# Altium PCB helix_4_single_shield_host.PcbDoc (part 1 of 2)
Units mm, origin at the board's own origin, x right, y up, seen from the top; angles counter-clockwise.
Board outline 54.61 x 130.81 mm, 2 copper layers (Top Layer, Bottom Layer); 77 components, 135 nets, 533 pads, 664 vias.
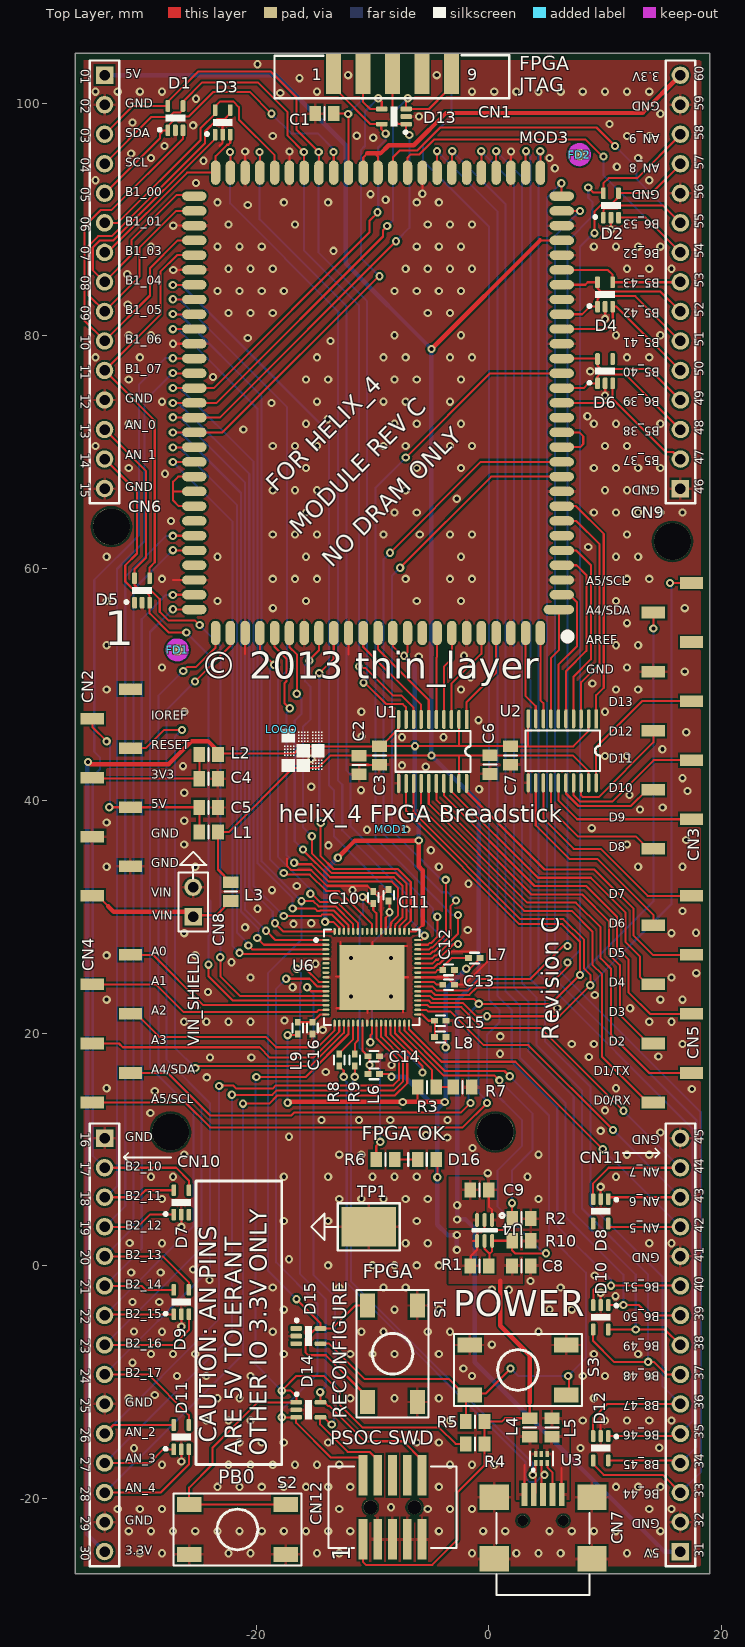
[diagram p0: Top Layer view]
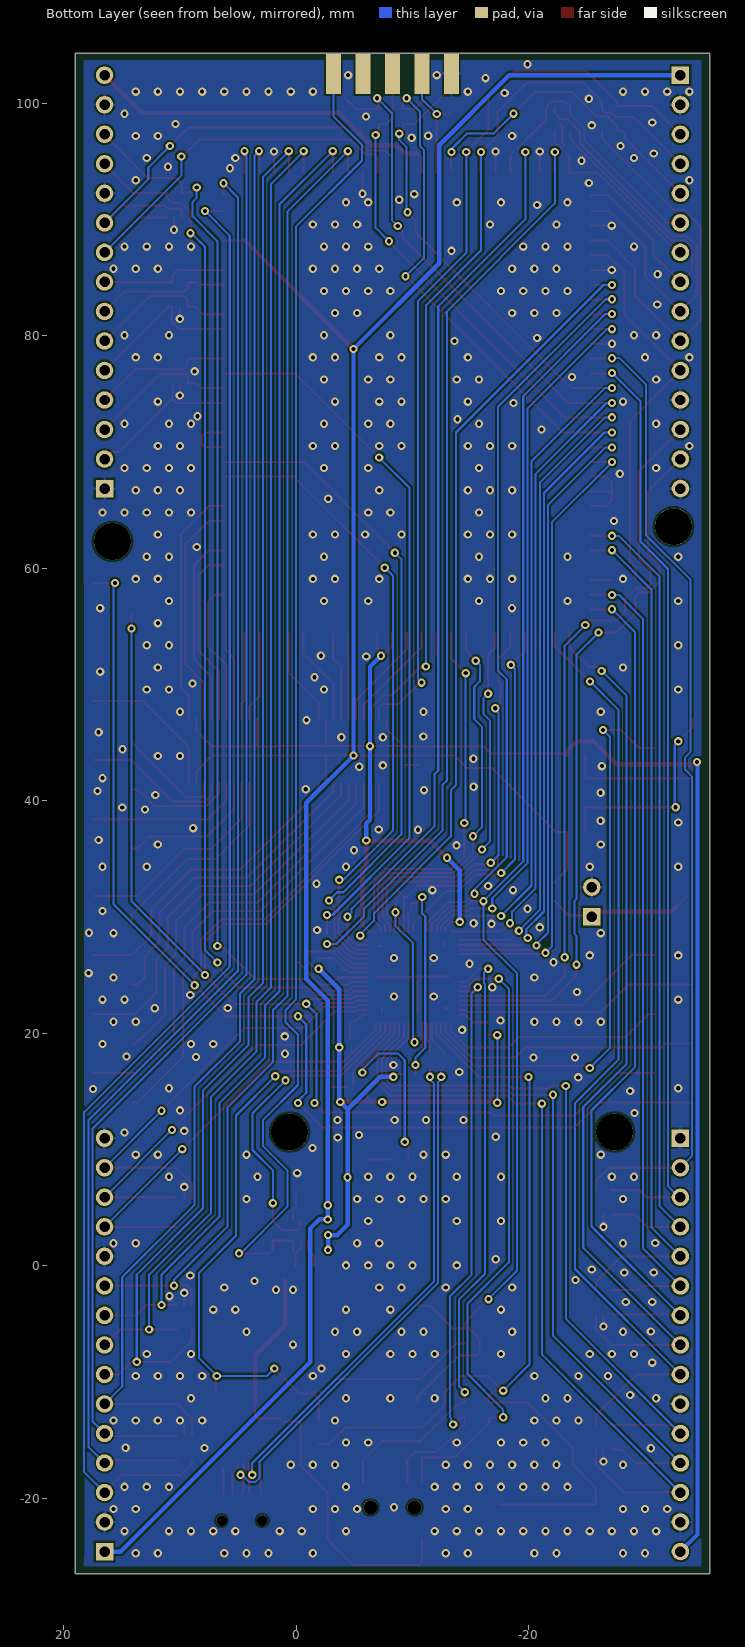
[diagram p1: Bottom Layer view, seen from below]

## Layer stack, top to bottom
Top Layer: signal copper 0.0356
Dielectric: core 0.32, FR-4, Dk 4.8
Bottom Layer: signal copper 0.0356

## Board outline
-35.598,-26.486 -35.598,104.324 19.012,104.324 19.012,-26.486

## Design rules (kind name [scope] priority, off if disabled: settings)
Clearance [All] p1: gap=0.178
ComponentClearance "Ignore Shield" [InComponent('MOD1')] p1: gap=0 collisioncheckmode=3 verticalgap=0 showdistances=TRUE
ComponentClearance [All] p2: gap=0.254 collisioncheckmode=3 verticalgap=0.254 showdistances=FALSE
HoleSize [All] p1: absolutevalues=TRUE maxlimit=25.4 minlimit=0.356 maxpercent=80.000 minpercent=20.000
PolygonConnect PolygonConnect_1 [All vs IsVia] p1: connectstyle=Direct reliefconductorwidth=0.254 reliefentries=4 polygonreliefangle="90 Angle"
PolygonConnect [All] p2: connectstyle=Relief reliefconductorwidth=0.254 reliefentries=4 polygonreliefangle="90 Angle"
RoutingVias [All] p1: holewidth=0.356 width=0.711 viastyle="Through Hole" minholewidth=0.356 minwidth=0.711 maxholewidth=0.711 maxwidth=1.27
SilkscreenOverComponentPads [All] p1: minsilkscreentomaskgap=0.254
SolderMaskExpansion [All] p1: expansion=0.102
Width [All] p1: maxlimit=2.032 minlimit=0.178 preferedwidth=0.178 minimp=50.000000 maximp=50.000000 favimp=50.000000
25 further rules are at their usual default settings.

## Components (designator, comment, footprint, x,y, rotation, side; value= is the part's Value field where it differs from the comment)
C1 "1uF" 0805 -14.135,99.117 r0 top
C2 "1uF" 0805 -11.171,43.09 r90 top locked
C3 "1uF" 0805 -9.407,43.89 r90 top locked
C4 "10uF" 0805 -24.105,41.903 r0 top
C5 "10uF" 0805 -24.105,39.427 r0 top
C6 "1uF" 0805 0.089,43.11 r90 top
C7 "1uF" 0805 1.867,43.89 r90 top
C8 "10uF 20V" 0805 2.794,0 r0 top
C9 "10uF" 0805 -0.8,6.534 r0 top
C10 "1uF" 0402_HD -9.944,31.68 r90 top
C11 "1uF" 0402_HD -8.624,31.877 r270 top
C12 "1uF" 0402_HD -3.467,25.457 r0 top
C13 "1uF" 0402_HD -3.467,24.187 r0 top
C14 "1uF" 0402_HD -9.894,18.034 r0 top
C15 "1uF" 0402_HD -4.179,21.082 r180 top
C16 "1uF" 0402_HD -15.178,20.453 r90 top
CN1 "Altera JTAG 2x5 Header" BOXHDR2X5_EDGE -13.373,105.34 r0 top
CN2 "UNO_SHIELD_POWER" UNO_SHIELD_POWER -30.831,49.609 r0 top locked
CN3 "UNO_SHIELD_DH" UNO_SHIELD_DH 14.149,35.893 r0 top locked
CN4 "UNO_SHIELD_ANALOG" UNO_SHIELD_ANALOG -30.831,26.749 r0 top locked
CN5 "UNO_SHIELD_DL" UNO_SHIELD_DL 14.149,14.049 r0 top locked
CN6 "Header 15" HDR1X15 -33.058,102.419 r270 top
CN7 "Header 5" USB_MINI_B 4.661,-19.661 r0 top
CN8 "Header 2" HDR1X2 -25.438,30.029 r90 top
CN9 "Header 15" HDR1X15 16.472,66.859 r90 top
CN10 "Header 15" HDR1X15 -33.058,10.979 r270 top
CN11 "Header 15" HDR1X15 16.472,-24.581 r90 top
CN12 "Header Keyed 50mil SMD" SBH41_127_10W_DUAL -8.293,-20.771 r0 top
D1 "CPDV5-3V3UP" SOT-353 -26.962,98.719 r90 top
D2 "CPDV5-3V3UP" SOT-353 10.503,91.218 r90 top
D3 "CPDV5-3V3UP" SOT-353 -22.898,98.355 r90 top
D4 "CPDV5-3V3UP" SOT-353 9.995,83.559 r90 top
D5 "CPDV5-3V3UP" SOT-353 -29.832,58.096 r90 top
D6 "CPDV5-3V3UP" SOT-353 9.995,76.955 r90 top
D7 "CPDV5-3V3UP" SOT-353 -26.454,5.454 r90 top
D8 "CPDV5-3V3UP" SOT-353 9.614,4.692 r270 top
D9 "CPDV5-3V3UP" SOT-353 -26.454,-3.118 r90 top
D10 "CPDV5-3V3UP" SOT-353 9.614,-4.424 r270 top
D11 "CPDV5-3V3UP" SOT-353 -26.454,-14.739 r90 top
D12 "CPDV5-3V3UP" SOT-353 9.614,-15.691 r270 top
D13 "CPDV5-3V3UP" SOT-353 -8.166,98.863 r180 top
D14 "CPDV5-3V3UP" sot-353 -15.532,-12.389 r0 top
D15 "CPDV5-3V3UP" sot-353 -15.532,-6.039 r0 top
D16 "RED" 0805_HD_LED -5.334,9.144 r0 top
FD1 "1MM FIDUCIAL MARK" FID_1MM -26.81,52.984 r270 top
FD2 "1MM FIDUCIAL MARK" FID_1MM 7.79,95.584 r270 top
L1 "FERRITE" 0805 -24.105,37.331 r180 top
L2 "FERRITE" 0805 -24.105,43.999 r180 top
L3 "FERRITE DO NOT FIT" 0805 -22.2,32.188 r270 top
L4 "FERRITE" 0805 3.518,-13.913 r90 top
L5 "FERRITE" 0805 5.423,-13.913 r90 top
L6 "FERRITE" 0402_HD -9.894,16.51 r180 top
L7 "FERRITE" 0402_HD -1.245,26.473 r0 top
L8 "FERRITE" 0402_HD -4.179,19.685 r0 top
L9 "FERRITE" 0402_HD -16.448,20.453 r270 top
LOGO "Comment" "LOGO_SMALL - SILK" -17.818,46.158 r0 top
MOD1 "UNO SHIELD" UNO_SHIELD_MECH_NO_OUTLINE -30.831,49.609 r0 top locked
MOD3 "helix_4" HELIX_4_LCC104_HOST -9.535,74.234 r180 top locked
R1 "100K" 0805 -0.8,0 r180 top
R2 "10K" 0805 2.806,4.064 r180 top
R3 "100K" 0805 -5.322,15.367 r0 top
R4 "100K" 0805 -1.181,-15.31 r180 top
R5 "100K" 0805 -1.181,-13.405 r180 top
R6 "330R" 0805 -8.89,9.144 r180 top
R7 "100K" 0805 -2.274,15.367 r0 top
R8 "24R" 0402_HD -12.865,17.71 r270 top
R9 "24R" 0402_HD -11.532,17.71 r270 top
R10 "DO NOT FIT" 0805 2.806,2.159 r180 top
S1 "SW-PB" FSM4JSMA -8.293,-7.563 r180 top
S2 "SW-PB" FSM4JSMA -21.628,-22.676 r90 top
S3 "SW-PB" FSM4JSMA 2.502,-8.96 r270 top
TP1 "Test Point" TEST_POINT -10.325,3.359 r0 top
U1 "TXB0108" TSSOP20 -1.921,47.002 r270 top
U2 "TXB0108" TSSOP20 9.233,47.047 r270 top
U3 "SN65220 USB TVS SOT23-6_0" DRY6 4.026,-16.961 r0 top
U4 "MOSFET P/N" WSMini6-F1-B -0.369,3.048 r270 top
U6 "CY8C32xx_QFN68" PSOC_QFN68_HD -10.071,24.822 r0 top

## Footprints (in the part's own frame and the unit in brackets; to place one, negate y for a bottom-side part, rotate by r counter-clockwise, add the part's x,y. Pads: shape width x height; smd on the part's side, far side on the other; paste and mask are expansions set on the pad)
0402_HD [mm]
  rect 0.6x0.5 smd: 1(-0.5,0) 2(0.5,0)
  silkscreen extent -0.38,-0.46 0.38,0.46
0805 [mm] "Chip Resistor, Body 2.0x1.3mm, IPC High Density"
  rect 1x1.3 smd: 1(-0.8,0) 2(0.8,0)
  silkscreen extent 0,-0.55 0,0.55, body extent -1.07,-0.7 1.08,0.7, height 0.65
0805_HD_LED [mm] "Chip Resistor, Body 2.0x1.3mm, IPC High Density"
  rect 1x1.3 smd: A(0.8,0) K(-0.8,0)
  silkscreen extent -1.6,-0.55 0,0.55, body extent -1.07,-0.7 1.07,0.7, height 0.65
BOXHDR2X5_EDGE [mm] "Connector; Header; 5x2 Position"
  rect 1.27x3.5 smd: 1(0,-2.8) 3(2.54,-2.8) 5(5.08,-2.8) 7(7.62,-2.8) 9(10.16,-2.8)
  rect 1.27x3.5 smd far side: 2(0,-2.8) 4(2.54,-2.8) 6(5.08,-2.8) 8(7.62,-2.8) 10(10.16,-2.8)
  silkscreen extent -5.07,-4.9 15.13,-1.22
DRY6 [mm]
  rect 0.3x0.52 smd paste-0.015 mask+0.05: 1(0,0) 2(0.5,0) 3(1,0) 4(1,0.78) 5(0.5,0.78) 6(0,0.78)
  silkscreen extent -0.5,-0.7 1.5,1
FID_1MM [mm]
  round 1 smd paste+0 mask+0: 0(0,0)
  Top Layer keep-out circle w0.5: c0,0 r0.75
  Top Solder keep-out circle w0.5: c0,0 r0.75
FSM4JSMA [mm] "Push Button Switch"
  rect 1.3x2.1 smd: 1(-2.15,4.15) 1(-2.15,-4.15) 2(2.15,4.15) 2(2.15,-4.15)
  silkscreen extent -3.1,-5.5 3.1,5.5
HDR1X2 [mm] "Connector; Header; 2 Position"
  rect 1.5x1.5 hole 0.9: 1(0,0)
  round 1.5 hole 0.9: 2(2.54,0)
  silkscreen extent -1.27,-1.27 3.81,1.27
HDR1X15 [mm] "Connector; Header; 15 Position"
  rect 1.5x1.5 hole 0.9: 1(0,0)
  round 1.5 hole 0.9: 2(2.54,0) 3(5.08,0) 4(7.62,0) 5(10.16,0) 6(12.7,0) 7(15.24,0) 8(17.78,0) 9(20.32,0) 10(22.86,0) 11(25.4,0) 12(27.94,0) 13(30.48,0) 14(33.02,0) 15(35.56,0)
  silkscreen extent -1.27,-1.27 36.83,1.27
HELIX_4_LCC104_HOST [mm] "Module socket 32x40mm"
  oval 2.6x0.813 smd: 1(-15.55,17.78)
  oval 2.1x0.813 smd: 2(-15.8,16.51) 3(-15.8,15.24) 4(-15.8,13.97) 5(-15.8,12.7) 6(-15.8,11.43) 7(-15.8,10.16) 8(-15.8,8.89) 9(-15.8,7.62) 10(-15.8,6.35) 11(-15.8,5.08) 12(-15.8,3.81) 13(-15.8,2.54) 14(-15.8,1.27) 15(-15.8,0) 16(-15.8,-1.27) 17(-15.8,-2.54) 18(-15.8,-3.81) 19(-15.8,-5.08) 20(-15.8,-6.35) 21(-15.8,-7.62) 22(-15.8,-8.89) 23(-15.8,-10.16) 24(-15.8,-11.43) 25(-15.8,-12.7) 26(-15.8,-13.97) 27(-15.8,-15.24) 28(-15.8,-16.51) 29(-15.8,-17.78) 53(15.8,-17.78) 54(15.8,-16.51) 55(15.8,-15.24) 56(15.8,-13.97) 57(15.8,-12.7) 58(15.8,-11.43) 59(15.8,-10.16) 60(15.8,-8.89) 61(15.8,-7.62) 62(15.8,-6.35) 63(15.8,-5.08) 64(15.8,-3.81) 65(15.8,-2.54) 66(15.8,-1.27) 67(15.8,0) 68(15.8,1.27) 69(15.8,2.54) 70(15.8,3.81) 71(15.8,5.08) 72(15.8,6.35) 73(15.8,7.62) 74(15.8,8.89) 75(15.8,10.16) 76(15.8,11.43) 77(15.8,12.7) 78(15.8,13.97) 79(15.8,15.24) 80(15.8,16.51) 81(15.8,17.78)
  oval 0.813x2.1 smd: 30(-13.97,-19.8) 31(-12.7,-19.8) 32(-11.43,-19.8) 33(-10.16,-19.8) 34(-8.89,-19.8) 35(-7.62,-19.8) 36(-6.35,-19.8) 37(-5.08,-19.8) 38(-3.81,-19.8) 39(-2.54,-19.8) 40(-1.27,-19.8) 41(0,-19.8) 42(1.27,-19.8) 43(2.54,-19.8) 44(3.81,-19.8) 45(5.08,-19.8) 46(6.35,-19.8) 47(7.62,-19.8) 48(8.89,-19.8) 49(10.16,-19.8) 50(11.43,-19.8) 51(12.7,-19.8) 52(13.97,-19.8) 82(13.97,19.8) 83(12.7,19.8) 84(11.43,19.8) 85(10.16,19.8) 86(8.89,19.8) 87(7.62,19.8) 88(6.35,19.8) 89(5.08,19.8) 90(3.81,19.8) 91(2.54,19.8) 92(1.27,19.8) 93(0,19.8) 94(-1.27,19.8) 95(-2.54,19.8) 96(-3.81,19.8) 97(-5.08,19.8) 98(-6.35,19.8) 99(-7.62,19.8) 100(-8.89,19.8) 101(-10.16,19.8) 102(-11.43,19.8) 103(-12.7,19.8) 104(-13.97,19.8)
  silkscreen extent -16.6,19.8 -16,20.4
"LOGO_SMALL - SILK" [mm]
  silkscreen extent 0,-3.68 3.68,0
PSOC_QFN68_HD [mm] "QFN, 68-Leads, Body 8.1x8.1mm (max), Pitch 0.40mm, IPC High Density"
  oval 0.6x0.2 smd: 1(-3.95,3.2) 2(-3.95,2.8) 3(-3.95,2.4) 4(-3.95,2) 5(-3.95,1.6) 6(-3.95,1.2) 7(-3.95,0.8) 8(-3.95,0.4) 9(-3.95,0) 10(-3.95,-0.4) 11(-3.95,-0.8) 12(-3.95,-1.2) 13(-3.95,-1.6) 14(-3.95,-2) 15(-3.95,-2.4) 16(-3.95,-2.8) 17(-3.95,-3.2) 35(3.95,-3.2) 36(3.95,-2.8) 37(3.95,-2.4) 38(3.95,-2) 39(3.95,-1.6) 40(3.95,-1.2) 41(3.95,-0.8) 42(3.95,-0.4) 43(3.95,0) 44(3.95,0.4) 45(3.95,0.8) 46(3.95,1.2) 47(3.95,1.6) 48(3.95,2) 49(3.95,2.4) 50(3.95,2.8) 51(3.95,3.2)
  oval 0.2x0.6 smd: 18(-3.2,-3.95) 19(-2.8,-3.95) 20(-2.4,-3.95) 21(-2,-3.95) 22(-1.6,-3.95) 23(-1.2,-3.95) 24(-0.8,-3.95) 25(-0.4,-3.95) 26(0,-3.95) 27(0.4,-3.95) 28(0.8,-3.95) 29(1.2,-3.95) 30(1.6,-3.95) 31(2,-3.95) 32(2.4,-3.95) 33(2.8,-3.95) 34(3.2,-3.95) 52(3.2,3.95) 53(2.8,3.95) 54(2.4,3.95) 55(2,3.95) 56(1.6,3.95) 57(1.2,3.95) 58(0.8,3.95) 59(0.4,3.95) 60(0,3.95) 61(-0.4,3.95) 62(-0.8,3.95) 63(-1.2,3.95) 64(-1.6,3.95) 65(-2,3.95) 66(-2.4,3.95) 67(-2.8,3.95) 68(-3.2,3.95)
  rect 5.588x5.588 smd: 69(0,0)
  silkscreen extent -4.92,-4.1 4.1,4.1, body extent -4.05,-4.05 4.05,4.05, height 1
SBH41_127_10W_DUAL [mm] "SBH41_NBPB_Dxx"
  rect 0.76x3.5 smd: 1(-2.54,-2.75) 2(-2.54,2.75) 3(-1.27,-2.75) 4(-1.27,2.75) 5(0,-2.75) 6(0,2.75) 7(1.27,-2.75) 8(1.27,2.75) 9(2.54,-2.75) 10(2.54,2.75)
  round 1.2 hole 1.2 unplated: 11(-1.905,0) 12(1.905,0)
  silkscreen extent -5.5,-3.5 5.5,3.5
SOT-353 [mm] "Small outline 2.1mm L x 1.25mm W x 1mm H; 5LD SC-70; SC-88A"
  round 0.5 on Mech14: 0(0,0)
  rrect50% 1x0.4 smd: 1(-1.05,0.65) 2(-1.05,0) 3(-1.05,-0.65) 4(1.05,-0.65) 5(1.05,0.65)
  silkscreen extent -1.1,-0.85 0.3,1.45, body extent -1.2,-1.1 1.2,1.1, height 1.1
sot-353 [mm] "Small outline 2.1mm L x 1.25mm W x 1mm H; 5LD SC-70; SC-88A"
  round 0.5 on Mech14: 0(0,0)
  rrect50% 1x0.4 smd: 1(-1.05,0.65) 2(-1.05,0) 3(-1.05,-0.65) 4(1.05,-0.65) 5(1.05,0.65)
  silkscreen extent -1.1,-0.85 0.3,1.45, body extent -1.2,-1.1 1.2,1.1, height 1.1
TEST_POINT [mm]
  rect 4.7x3.43 smd paste-3: 1(0,0)
  silkscreen extent -2.67,-2.03 2.67,2.03
TSSOP20 [mm]
  rect 1.65x0.3 smd: 1(0,0)
  oval 1.65x0.3 smd: 2(0,-0.65) 3(0,-1.3) 4(0,-1.95) 5(0,-2.6) 6(0,-3.25) 7(0,-3.9) 8(0,-4.55) 9(0,-5.2) 10(0,-5.85) 11(5.5,-5.85) 12(5.5,-5.2) 13(5.5,-4.55) 14(5.5,-3.9) 15(5.5,-3.25) 16(5.5,-2.6) 17(5.5,-1.95) 18(5.5,-1.3) 19(5.5,-0.65) 20(5.5,0)
  silkscreen extent 1,-6.1 4.5,0.33
UNO_SHIELD_ANALOG [mm] "Connector; Header; 2 Position"
  rect 2x1 smd: 9(0,0) 10(-3.28,-2.54) 11(0,-5.08) 12(-3.28,-7.62) 13(0,-10.16) 14(-3.28,-12.7)
UNO_SHIELD_DH [mm]
  rect 2x1 smd: 29(0,-0.016) 30(3.28,2.524) 31(0,5.064) 32(3.28,7.604) 33(0,10.144) 34(3.28,12.684) 35(0,15.224) 36(3.28,17.764) 37(0,20.304) 38(3.28,22.844)
UNO_SHIELD_DL [mm]
  rect 2x1 smd: 21(0,0) 22(3.28,2.54) 23(0,5.08) 24(3.28,7.62) 25(0,10.16) 26(3.28,12.7) 27(0,15.24) 28(3.28,17.78)
UNO_SHIELD_MECH_NO_OUTLINE [mm]
  round 3.175 hole 3.175 unplated: 0(-1.64,13.97) 0(3.44,-38.1) 0(31.38,-38.1) 0(46.62,12.7)
UNO_SHIELD_POWER [mm]
  rect 2x1 smd: 1(0,0) 2(-3.28,-2.54) 3(0,-5.08) 4(-3.28,-7.62) 5(0,-10.16) 6(-3.28,-12.7) 7(0,-15.24) 8(-3.28,-17.78)
USB_MINI_B [mm]
  rect 2.5x2.2 smd: 0(-4.2,-5.55) 0(-4.2,-0.25) 0(4.2,-5.55) 0(4.2,-0.25)
  round 0.9 hole 0.9 unplated: 0(-1.75,-2.25) 0(1.75,-2.25)
  rect 0.5x2 smd: 1(-1.6,0) 2(-0.8,0) 3(0,0) 4(0.8,0) 5(1.6,0)
  silkscreen extent -4,-8.65 4,-1.6
WSMini6-F1-B [mm] "For Panasonic MTM763200LBF"
  oval 1.2x0.35 smd: D1(0.9,0.65) D2(-0.9,-0.65) G1(-0.9,0) G2(0.9,0) S1(-0.9,0.65) S2(0.9,-0.65)
  silkscreen extent -1.45,-1.05 0.1,1.67, body extent -0.9,-1.05 0.9,1.05, height 0.7

## Part data
C1 C2 C3 C4 C5 C6 C7 C8 C9: library part CAP, "Capacitor"
C10 C12: library part CAP, "CAP, CER, 10 uF, 16 V, 5%, X5R, 0805, SMD"
C11 C13 C15 C16: library part CAP, "CAP CER 1.2 uF 10 V 10% X5R 0805 SMD"
C14: library part CAP, "CAP, CER, 1.0 uF, 10 V, 10%, X5R, 0603, SMD"
CN1: "Header, 5-Pin, Dual row"
CN6 CN9 CN10 CN11: "Header, 15-Pin"
CN7: "Header, 5-Pin"
CN8: "Header, 2-Pin"
CN12: library part HDR_2X5, "CONN, HDR, KEYED, 2x5, 0.050\", Gold, SMD"
D1 D2 D3 D4 D5 D6 D7 D8 D9 D10 D11 D12 D13: library part "4CH ESD DIODE", "4CH ESD DIODE 3V3/3.5V"
D14 D15: library part "4CH ESD DIODE (SPLIT)", "4CH ESD DIODE 3V3/3.5V"
D16: library part LED
FD1 FD2: library part FID
L3: library part FERRITE, "FERRITE"
MOD1: library part UNO_SHIELD_MECH
MOD3: library part "helix_4 Rev C Module"
R1 R2 R3 R4 R5 R6 R7 R8 R9 R10: library part RES1
S1 S2 S3: "Switch"
U1 U2: "TI Bir-dir buffer"
U4: library part PN_PAIR
U6: library part CY8C38XX_100P_ALT, "IC, PSoC3"

## Via types
v1: diameter 0.711, hole 0.356, Top Layer to Bottom Layer, tented both sides, 634 vias
v2: diameter 0.711, hole 0.356, Top Layer to Bottom Layer, 30 vias

## Nets (pads, with @x,y where several pads share a name; then routed paths per layer and width w, separated by ;. In a path a pad name is that pad's centre, name@x,y a point inside that pad or via, vN(x,y) a via of type N, cw(c..) or ccw(c..) an arc to the next point about the centre after c; other vN are vias at no path point)
2V5_JTAG: C1.2 CN1.4 MOD3.43 | length 10.6
  Top Layer w0.178: C1.2@-13.335,99.117 v1@-12.107,99.117 ; MOD3.43@-12.075,94.034 v1@-12.075,99.085
  Bottom Layer w0.178: v1(-12.103,99.085) -10.833,100.355 CN1.4@-10.833,102.831
3V3: C3.2 C7.2 CN10.15 L2.1 MOD3.94 MOD3.95 U1.2 U1.10 U2.2 U2.10 U6.52 U6.67 | length 167.6
  Top Layer w0.178: L2.1@-23.18,44.123 -23.126,44.069 -16.765,44.069 -16.144,44.69 C3.2@-9.407,44.69 ; v1(-14.085,29.591) -13.371,29.591 -12.871,29.091 U6.67@-12.871,28.772 ; MOD3.94@-8.265,54.434 -8.265,53.293 -7.429,52.457 -7.328,52.457 -6.995,52.79 MOD3.95@-6.995,54.434 ; U1.10@-7.771,47.002 -7.771,46.192 -9.273,44.69 C3.2@-9.407,44.69 ; U6.52@-6.871,28.772 -6.268,28.772 -5.703,29.337 ; U1.2@-2.571,47.002 -2.571,44.715 ; 3.383,44.707 U2.10@3.383,47.047 ; U2.2@8.583,47.047 8.583,46.016 7.257,44.69 C7.2@1.867,44.69 1.842,44.715 -2.571,44.715 ; C3.2@-9.407,44.69 -9.382,44.715 -2.571,44.715
  Top Layer w0.381: v1@-34.48,43.364 -34.277,43.161 -27.546,43.161 -25.565,45.142 -24.168,45.142 -23.304,44.278 L2.1@-23.304,43.999 ; v1(-12.992,35.109) -11.519,36.582 v1(-6.032,36.582) -6.032,34.365 -5.703,34.036 -5.703,29.337
  Bottom Layer w0.381: v1@-34.532,43.339 -34.532,-23.107 CN10.15@-33.058,-24.581 ; v1(-14.085,29.591) -14.085,34.016 v1(-12.992,35.109) ; v1@-7.277,52.457 -6.363,51.543 v1(-6.363,44.704) -6.363,38.379 -6.032,38.048 v1(-6.032,36.582)
  other v1: -34.48,43.339 -7.302,52.483
3V3_0: C4.1 CN2.4 L2.2 | length 11.2
  Top Layer w0.178: CN2.4@-34.026,41.903 C4.1@-24.905,41.903 L2.2@-24.904,43.999
3V3_LEFT: MOD3.72 MOD3.73 MOD3.74 | length 7.5
  Top Layer w0.178: MOD3.74@-25.335,65.344 -26.666,65.344 -27.155,65.833 -27.155,66.614 ; MOD3.73@-25.335,66.614 -27.155,66.614 ; MOD3.72@-25.335,67.884 -26.724,67.884 -27.155,67.453 -27.155,66.614
3V3_RIGHT: MOD3.12 MOD3.13 | length 4.6
  Top Layer w0.178: MOD3.12@6.265,70.424 7.845,70.424 8.115,70.694 8.115,71.355 7.776,71.694 MOD3.13@6.265,71.694
3V3_TOP: CN9.15 MOD3.41 MOD3.42 | length 33.3
  Top Layer w0.178: MOD3.42@-10.805,94.034 -10.805,95.335 -10.452,95.688 ; -9.817,95.688 -9.535,95.406 MOD3.41@-9.535,94.034
  Top Layer w0.381: -10.452,95.688 -9.817,95.688 -9.329,95.688 -8.624,96.393 -6.465,96.393 -3.69,99.168 13.221,99.168 CN9.15@16.472,102.419
5V: C2.2 C6.2 C9.1 CN6.1 CN11.1 L1.1 L3.1 MOD3.26 U1.19 U2.19 U4.D2 | length 217.4
  Top Layer w0.178: L3.1@-22.2,32.988 -23.304,34.093 L1.1@-23.304,37.332 -22.346,37.332 -16.847,42.831 -14.694,42.831 -13.634,43.89 C2.2@-11.171,43.89 v1(-4.941,43.89) -2.571,43.89 ; U1.19@-2.571,41.502 -2.571,43.89 ; 4.396,88.204 MOD3.26@6.265,88.204 ; U2.19@8.583,41.547 8.583,42.553 7.246,43.89 -2.571,43.89
  Top Layer w0.381: v1@-5.005,78.803 4.396,88.204
  Bottom Layer w0.381: CN6.1@-33.058,102.419 -18.326,102.419 -12.307,96.4 -12.307,86.234 v1(-4.94,78.867) v1(-4.941,43.89) -0.876,39.825 -0.876,24.67 -2.73,22.815 v1(-2.73,3.994) ; v1@-2.705,4.019 -2.019,4.019 -1.206,3.207 -1.206,-8.3 15.075,-24.581 CN11.1@16.472,-24.581
  other v1: -2.73,5.213
5V_0: C5.1 CN2.2 CN2.5 L1.2 | length 18.1
  Top Layer w0.178: CN2.2@-34.111,47.069 -34.111,46.347 v1(-32.88,45.117) ; v1(-32.652,39.452) -32.648,39.449 CN2.5@-30.831,39.449 -24.927,39.449 C5.1@-24.905,39.427 L1.2@-24.904,37.332
  Bottom Layer w0.178: v1(-32.88,45.117) -32.573,44.809 -32.573,39.531 v1(-32.652,39.452)
AN_0: CN6.13 D5.5 U6.13 | length 63.6
  Top Layer w0.178: CN6.13@-33.058,71.939 -29.502,68.383 -29.502,60.89 -30.482,59.91 D5.5@-30.482,59.146 -30.482,58.568 -30.201,58.286 -29.248,58.286 -28.309,57.347 -28.309,56.261 -27.547,55.499 -25.261,55.499 v1(-24.88,55.118) ; v1(-23.102,26.543) -23.102,24.899 -21.425,23.222 U6.13@-14.021,23.222
  Bottom Layer w0.178: v1(-24.88,55.118) -23.102,53.34 v1(-23.102,26.543)
AN_1: CN6.14 D5.3 U6.14 | length 61.6
  Top Layer w0.178: CN6.14@-33.058,69.399 -30.264,66.605 -30.264,61.271 -31.28,60.255 -31.28,58.863 -30.322,57.905 -29.439,57.905 -29.182,57.649 D5.3@-29.182,57.046 -29.182,56.118 -27.547,54.483 -26.15,54.483 v1@-26.023,54.61 ; v1(-24.118,25.908) -24.118,24.899 -22.041,22.822 U6.14@-14.021,22.822
  Bottom Layer w0.178: v1(-26.023,54.483) -24.118,52.578 -24.118,31.553 -23.965,31.4 -23.965,28.531 -24.118,28.378 v1(-24.118,25.908)
AN_2: CN10.11 D11.5 U6.27 | length 61.6
  Top Layer w0.178: CN10.11@-33.058,-14.421 -32.326,-13.689 D11.5@-27.104,-13.689 ; v1@-23.05,15.526 -22.009,15.526 -21.73,15.246 -18.605,15.246 -18.326,15.526 -8.22,15.526 -7.748,15.998 -7.748,17.676 -9.671,19.599 U6.27@-9.671,20.872
  Bottom Layer w0.178: CN10.11@-33.058,-14.421 -23.204,-4.567 v1(-23.204,15.475)
AN_3: CN10.12 D11.1 U6.28 | length 63.6
  Top Layer w0.178: CN10.12@-33.058,-16.961 -29.185,-16.961 -28.012,-15.789 D11.1@-27.104,-15.789 ; v1(-22.111,14.713) -18.631,14.713 -18.25,15.094 -8.149,15.094 -7.392,15.851 -7.392,17.823 -9.271,19.702 U6.28@-9.271,20.872
  Bottom Layer w0.178: CN10.12@-33.058,-16.961 -22.111,-6.014 v1(-22.111,14.713)
AN_4: CN10.13 D11.3 U6.29 | length 68.7
  Top Layer w0.178: CN10.13@-33.058,-19.501 -28.219,-19.501 -25.804,-17.086 D11.3@-25.804,-15.789 ; v1(-21.145,13.951) -18.89,13.951 -18.179,14.662 -8.078,14.662 -7.023,15.717 -7.023,17.957 -8.871,19.805 U6.29@-8.871,20.872
  Bottom Layer w0.178: CN10.13@-33.058,-19.501 -21.145,-7.588 v1(-21.145,13.951)
AN_5: CN11.12 D8.5 U6.34 | length 37.2
  Top Layer w0.178: U6.34@-6.871,20.872 -6.871,20.352 -4.077,17.558 2.273,17.558 v1(9.791,10.04) ; D8.5@10.185,3.359 CN11.12@16.472,3.359
  Bottom Layer w0.178: v1(9.791,10.04) CN11.12@16.472,3.359
AN_6: CN11.13 D8.1 U6.36 | length 35.3
  Top Layer w0.178: U6.36@-6.121,22.022 -5.378,22.022 -5.248,21.892 -3.339,21.892 -0.427,18.98 3.391,18.98 v1(10.681,11.69) ; D8.1@10.42,5.899 CN11.13@16.472,5.899
  Bottom Layer w0.178: v1(10.681,11.69) CN11.13@16.472,5.899
AN_7: CN11.14 D8.3 U6.37 | length 37.6
  Top Layer w0.178: U6.37@-6.121,22.422 -5.275,22.422 -5.101,22.248 -2.366,22.248 -0.558,20.44 4.471,20.44 v1@11.684,13.227 ; D8.3@8.964,5.742 8.964,7.09 10.312,8.439 CN11.14@16.472,8.439
  Bottom Layer w0.178: 11.83,13.081 CN11.14@16.472,8.439
  other v1: 11.571,13.34
AN_8: CN9.12 D2.4 U6.40 | length 89.3
  Top Layer w0.178: U6.40@-6.121,23.622 -4.941,23.622 -4.634,23.315 -1.677,23.315 -1.054,23.938 4.971,23.938 v1@6.947,25.914 ; v1(9.081,88.83) 9.081,90.684 9.836,91.44 10.655,91.44 11.153,91.938 D2.4@11.153,92.268 ; D2.4@11.113,92.268 13.991,92.268 CN9.12@16.497,94.774
  Bottom Layer w0.178: v1@6.947,25.914 6.947,26.27 7.836,27.159 7.836,87.662 9.004,88.83 v1(9.081,88.83)
  other v1: 6.769,26.092
AN_9: CN9.13 D2.5 U6.41 | length 91.6
  Top Layer w0.178: U6.41@-6.121,24.022 -4.833,24.022 -4.481,23.67 -1.825,23.67 -0.825,24.67 3.569,24.67 6.414,27.514 v1@6.591,27.514 ; v1(8.547,92.767) 9.004,92.31 9.716,92.31 D2.5@9.758,92.268 ; D2.5@9.853,92.268 9.853,93.108 10.312,93.567 12.751,93.567 CN9.13@16.497,97.314
  Bottom Layer w0.178: v1@6.591,27.337 v1(6.769,27.514) 6.769,88.144 8.903,90.278 8.903,91.522 8.547,91.878 v1(8.547,92.767)
ASDO: MOD3.49 U6.50 | length 77.8
  Top Layer w0.178: MOD3.49@-19.695,94.034 v1@-19.695,95.974 ; U6.50@-6.121,27.622 -5.244,27.622 -5.114,27.752 -4.982,27.752 -4.432,28.302 v1@-4.432,30.004
  Bottom Layer w0.178: v1(-19.723,95.815) -19.723,90.029 -12.23,82.536 -12.23,42.595 -11.9,42.265 -11.9,37.827 -4.788,30.715 -4.788,30.359 v1@-4.432,30.004
  other v1: -4.432,30.029
B1_00: CN6.5 D1.1 MOD3.44 | length 27.5
  Top Layer w0.178: CN6.5@-33.058,92.259 -33.023,92.259 -28.291,96.991 -28.291,97.356 -27.978,97.669 D1.1@-27.612,97.669 -27.612,98.038 -26.787,98.863 -25.819,98.863 -23.692,100.99 -20.586,100.99 v1(-18.707,99.112) v1@-18.697,99.102 ; MOD3.44@-13.345,94.288 v1@-13.345,95.787
  Bottom Layer w0.178: v1(-18.707,99.112) -17.004,97.409 -14.713,97.409 -13.373,96.069 v1(-13.373,95.815)
B1_01: CN6.6 D3.5 MOD3.48 | length 24
  Top Layer w0.178: CN6.6@-33.058,89.719 -31.915,89.719 -24.803,96.831 -24.803,97.847 -23.548,99.102 -23.548,99.737 -23.113,100.172 -21.996,100.172 -21.501,99.677 -21.501,98.609 -18.425,95.533 MOD3.48@-18.425,94.034
B1_03: CN6.7 D3.3 MOD3.52 | length 16.5
  Top Layer w0.178: CN6.7@-33.058,87.179 -32.804,87.179 -25.949,94.034 MOD3.52@-23.505,94.034 -23.505,95.453 -22.521,96.437 -22.403,96.437 -22.248,96.592 D3.3@-22.248,97.559
B1_04: CN6.8 D3.1 MOD3.53 | length 29.9
  Top Layer w0.178: -32.637,88.196 -33.479,88.196 -34.075,87.6 -34.075,85.656 CN6.8@-33.058,84.639 -30.747,86.95 -30.747,88.22 -26.848,92.119 -25.44,92.119 MOD3.53@-25.335,92.014 ; -32.636,88.195 -32.301,88.195 -23.548,96.948 D3.1@-23.548,97.495
B1_05: CN6.9 D3.4 MOD3.54 | length 36.9
  Top Layer w0.178: MOD3.54@-25.335,90.744 -26.902,90.744 -30.035,87.611 -30.035,85.122 CN6.9@-33.058,82.099 -34.43,83.471 -34.43,87.747 -33.602,88.576 -32.423,88.576 -24.422,96.577 -24.422,97.577 -23.364,98.634 -22.746,98.634 -22.248,99.132 D3.4@-22.248,99.595
B1_06: CN6.10 D1.3 MOD3.56 | length 35.6
  Top Layer w0.178: D1.3@-26.312,97.669 -26.312,96.968 -32.475,90.805 -33.41,90.805 -34.786,89.429 -34.786,81.287 CN6.10@-33.058,79.559 -29.146,83.471 -29.146,85.82 -26.762,88.204 MOD3.56@-25.335,88.204
B1_07: CN6.11 D5.4 MOD3.57 | length 33.8
  Top Layer w0.178: D5.4@-29.182,59.146 -29.182,60.067 -28.74,60.509 -28.74,72.701 CN6.11@-33.058,77.019 -28.257,81.82 -28.257,85.503 -26.826,86.934 MOD3.57@-25.335,86.934
B1_10: CN10.2 D7.4 MOD3.64 | length 84.1
  Top Layer w0.178: CN10.2@-33.058,8.439 -26.899,8.439 -25.804,7.344 D7.4@-25.804,6.504 ; v1@-27.155,78.044 MOD3.64@-25.335,78.044
  Bottom Layer w0.178: CN10.2@-33.058,8.439 -34.075,9.456 -34.075,42.082 -33.464,42.692 -33.464,43.745 -33.947,44.228 -33.947,59.005 -30.087,62.865 -30.087,75.824 -27.837,78.074 v1(-27.185,78.074)
B1_11: CN10.3 D7.5 MOD3.65 | length 81.4
  Top Layer w0.178: CN10.3@-33.058,5.899 -30.146,5.899 -29.541,6.504 D7.5@-27.104,6.504 ; v1@-27.155,76.774 MOD3.65@-25.335,76.774
  Bottom Layer w0.178: CN10.3@-32.995,5.835 -31.991,6.839 -31.991,59.945 -29.629,62.307 -29.629,74.36 v1(-27.185,76.804)
B2_12: CN10.4 D7.1 MOD3.76 | length 70.4
  Top Layer w0.178: CN10.4@-33.058,3.359 -30.201,3.359 -29.155,4.404 D7.1@-27.104,4.404 ; v1@-27.175,62.804 MOD3.76@-25.335,62.804
  Bottom Layer w0.178: CN10.4@-33.058,3.359 -31.28,5.137 -31.28,59.264 -27.75,62.794 v1(-27.185,62.794)
B2_13: CN10.5 D9.4 MOD3.77 | length 73.8
  Top Layer w0.178: CN10.5@-33.058,0.819 -28.042,0.819 -25.804,-1.419 D9.4@-25.804,-2.068 ; v1@-27.155,61.534 MOD3.77@-25.335,61.534
  Bottom Layer w0.178: CN10.5@-33.058,0.819 -30.569,3.308 -30.569,58.18 v1(-27.185,61.564)
B2_14: CN10.6 D9.5 MOD3.80 | length 70.2
  Top Layer w0.178: CN10.6@-33.058,-1.721 -29.883,-1.721 -29.536,-2.068 D9.5@-27.104,-2.068 ; v1@-27.175,57.724 MOD3.80@-25.335,57.724
  Bottom Layer w0.178: CN10.6@-33.122,-1.785 -29.858,1.479 -29.858,55.632 -27.776,57.714 v1(-27.185,57.714)
B2_15: CN10.7 D9.1 MOD3.81 | length 74.1
  Top Layer w0.178: CN10.7@-33.058,-4.261 -32.965,-4.168 D9.1@-27.104,-4.168 ; v1@-27.155,56.454 MOD3.81@-25.335,56.454
  Bottom Layer w0.178: CN10.7@-33.058,-4.261 -25.413,3.384 -25.413,13.36 -29.146,17.093 -29.146,54.523 v1(-27.185,56.484)
B2_16: CN10.8 D9.3 MOD3.82 | length 77.9
  Top Layer w0.178: CN10.8@-33.058,-6.801 -27.103,-6.801 -25.794,-5.491 -25.794,-4.944 -25.804,-4.934 D9.3@-25.804,-4.168 ; v1(-26.286,51.175) -25.944,51.517 -25.179,51.517 -23.505,53.191 MOD3.82@-23.505,54.434
  Bottom Layer w0.178: CN10.8@-33.058,-6.801 -29.68,-3.423 -24.701,1.556 -24.701,13.664 -28.435,17.398 -28.435,49.026 v1(-26.286,51.175)
B2_17: CN10.9 D11.4 MOD3.83 | length 81.1
  Top Layer w0.178: CN10.9@-33.058,-9.341 -29.312,-9.341 -25.804,-12.849 D11.4@-25.804,-13.689 ; v1@-25.509,50.338 -25.215,50.338 -22.235,53.318 MOD3.83@-22.235,54.434
  Bottom Layer w0.178: CN10.9@-33.058,-9.341 -23.99,-0.273 -23.99,14.002 -27.724,17.735 -27.724,47.829 v1(-25.28,50.273)
B2_18: MOD3.85 U6.60 | length 31.6
  Top Layer w0.178: MOD3.85@-19.695,54.434 -19.695,52.912 v1@-18.656,51.873 ; v1(-17.641,33.782) -17.514,33.655 -15.399,33.655 -14.002,32.258 -12.91,32.258 -10.071,29.419 U6.60@-10.071,28.772
  Bottom Layer w0.178: v1(-18.478,51.695) -18.834,51.34 -18.834,34.975 v1(-17.641,33.782)
B2_19: MOD3.86 U6.56 | length 34.7
  Top Layer w0.178: MOD3.86@-18.425,54.434 -18.425,53.235 -17.412,52.222 -17.412,50.273 -17.589,50.095 -17.589,48.419 -17.234,48.063 v1@-17.234,47.961 ; v1@-17.339,47.857 v1@-17.234,47.752 ; v1@-16.752,34.544 -15.282,34.544 -13.789,33.052 -8.353,33.052 -7.799,32.497 -7.799,30.146 -8.395,29.55 -8.395,29.447 -8.439,29.402 -8.439,29.281 -8.471,29.25 U6.56@-8.471,28.772
  Bottom Layer w0.178: v1@-17.234,47.961 -17.183,47.911 -17.183,47.809 -17.412,47.58 -17.412,35.331 v1(-16.752,34.671)
  other v1: -17.132,47.961
B2_20: MOD3.87 U6.55 | length 33.9
  Top Layer w0.178: MOD3.87@-17.155,54.434 -17.155,53.235 -16.523,52.603 v1(-16.523,49.206) ; v1(-15.99,35.814) -15.99,35.755 -13.661,33.426 -8.167,33.426 -7.43,32.69 -7.43,29.993 -8.027,29.397 -8.027,29.294 -8.071,29.25 U6.55@-8.071,28.772
  Bottom Layer w0.178: v1@-16.548,49.206 -16.116,48.774 -16.116,47.479 -16.7,46.895 -16.7,36.524 v1(-15.99,35.814) ; v1@-16.434,48.939 v1@-16.434,49.206
B2_21: MOD3.89 U6.54 | length 33.8
  Top Layer w0.178: v1@-15.479,52.073 -14.615,52.937 MOD3.89@-14.615,54.434 ; v1(-15.228,36.957) -15.228,35.496 -13.514,33.782 -7.989,33.782 -7.075,32.868 -7.075,29.846 -7.671,29.25 U6.54@-7.671,28.772
  Bottom Layer w0.178: v1(-15.456,52.051) -15.811,51.695 -15.811,50.273 -15.329,49.79 -15.329,47.022 -15.989,46.361 -15.989,37.718 v1(-15.228,36.957)
B2_22: MOD3.90 U6.53 | length 32.9
  Top Layer w0.178: v1(-14.593,50.984) -13.345,52.232 MOD3.90@-13.345,54.434 ; v1(-14.466,38.1) -14.466,35.237 -13.367,34.138 -7.842,34.138 -6.719,33.015 -6.719,29.699 -7.271,29.147 U6.53@-7.271,28.772
  Bottom Layer w0.178: v1@-14.593,38.1 v1(-14.593,50.984)
B2_CLKIN: MOD3.71 U6.4 | length 53.9
  Top Layer w0.178: v1@-27.175,69.154 MOD3.71@-25.335,69.154 ; v1@-21.426,26.822 U6.4@-14.021,26.822
  Bottom Layer w0.178: v1(-27.185,69.144) -22.034,63.994 -22.034,27.507 v1@-21.388,26.86
  other v1: -21.451,26.924
B3_23: MOD3.92 U1.7 | length 9.5
  Top Layer w0.178: MOD3.92@-10.805,54.434 -10.805,53.235 -5.821,48.251 U1.7@-5.821,47.002
B3_24: MOD3.93 U1.6 | length 9.2
  Top Layer w0.178: MOD3.93@-9.535,54.434 -9.535,53.039 -5.171,48.675 U1.6@-5.171,47.002
B4_27: MOD3.100 U1.3 | length 8.5
  Top Layer w0.178: U1.3@-3.221,47.002 -3.221,50.062 -0.645,52.638 MOD3.100@-0.645,54.434
B4_28: MOD3.101 U1.1 | length 8.5
  Top Layer w0.178: U1.1@-1.921,47.002 -1.921,48.486 0.625,51.032 MOD3.101@0.625,54.434
B5_25: MOD3.97 U1.5 | length 7.5
  Top Layer w0.178: U1.5@-4.521,47.002 -4.521,52.318 -4.455,52.384 MOD3.97@-4.455,54.434
B5_26: MOD3.98 U1.4 | length 7.7
  Top Layer w0.178: U1.4@-3.871,47.002 -3.871,51.539 -3.185,52.225 MOD3.98@-3.185,54.434
B5_29_8P: MOD3.103 U2.9 | length 7.7
  Top Layer w0.178: MOD3.103@3.165,54.434 3.165,49.007 4.033,48.139 U2.9@4.033,47.047
B5_30_8N: MOD3.104 U2.8 | length 7.5
  Top Layer w0.178: MOD3.104@4.435,54.434 4.435,48.651 4.683,48.403 U2.8@4.683,47.047
B5_31_9P: MOD3.1 U2.7 | length 9.7
  Top Layer w0.178: U2.7@5.333,47.047 5.333,52.277 6.015,52.959 MOD3.1@6.015,56.454
B5_32_9N: MOD3.2 U2.6 | length 12.3
  Top Layer w0.178: U2.6@5.983,47.047 5.983,51.691 7.582,53.29 7.582,57.08 6.938,57.724 MOD3.2@6.265,57.724
B5_33: MOD3.4 U2.5 | length 15.6
  Top Layer w0.178: MOD3.4@6.265,60.264 7.547,60.264 8.382,59.43 8.382,52.895 6.633,51.146 U2.5@6.633,47.047
B5_34: MOD3.5 U2.4 | length 16.9
  Top Layer w0.178: MOD3.5@6.265,61.534 7.522,61.534 8.775,60.281 8.775,52.171 7.283,50.679 U2.4@7.283,47.047
B5_35_10N: MOD3.7 U2.3 | length 19.8
  Top Layer w0.178: MOD3.7@6.265,64.074 7.522,64.074 9.525,62.071 9.525,51.803 7.933,50.211 U2.3@7.933,47.047
B5_36_10P: MOD3.8 U2.1 | length 20.8
  Top Layer w0.178: MOD3.8@6.265,65.344 7.497,65.344 9.881,62.96 9.881,49.727 9.233,49.079 U2.1@9.233,47.047
B5_37_11N: CN9.2 D6.3 MOD3.15 | length 15.2
  Top Layer w0.178: MOD3.15@6.265,74.234 6.278,74.221 10.258,74.221 10.63,74.593 10.63,75.89 D6.3@10.645,75.905 10.645,74.566 15.202,70.009 15.837,70.009 CN9.2@16.472,69.374
B5_38_11P: CN9.3 D6.1 MOD3.16 | length 13
  Top Layer w0.178: MOD3.16@6.265,75.504 8.163,75.504 8.564,75.905 D6.1@9.308,75.905 ; D6.1@9.345,75.905 D6.1@9.308,75.905 ; CN9.3@16.485,71.926 11.726,76.685 9.534,76.685 9.308,76.459 D6.1@9.308,75.905
B5_40_12N: CN9.5 D4.3 MOD3.20 | length 13.9
  Top Layer w0.178: MOD3.20@6.265,80.584 10.053,80.584 10.655,81.186 10.655,82.499 D4.3@10.645,82.509 10.981,82.509 CN9.5@16.37,77.121
B5_41_12P: CN9.6 D4.1 MOD3.21 | length 12.7
  Top Layer w0.178: MOD3.21@6.265,81.854 8.017,81.854 8.672,82.509 D4.1@9.345,82.509 9.345,83.159 9.593,83.407 12.598,83.407 CN9.6@16.383,79.622
B5_42: CN9.7 D4.5 MOD3.23 | length 11.6
  Top Layer w0.178: MOD3.23@6.265,84.394 8.29,84.394 8.505,84.609 D4.5@9.345,84.609 9.345,84.082 9.614,83.813 12.789,83.813 14.757,83.813 CN9.7@16.472,82.099
B5_43: CN9.8 D4.4 MOD3.24 | length 11
  Top Layer w0.178: MOD3.24@6.265,85.664 10.24,85.664 10.645,85.259 D4.4@10.645,84.609 12.281,84.609 16.442,84.609 CN9.8@16.472,84.639
B5_CLKIN_N: MOD3.11 U6.48 | length 57.9
  Top Layer w0.178: v1(-8.497,61.341) -0.684,69.154 MOD3.11@6.265,69.154 ; U6.48@-6.121,26.822 -5.038,26.822 -4.819,27.04 -4.688,27.04 -3.29,28.438 -3.29,30.968 -3.01,31.248 -2.832,31.248 v1@-2.654,31.426
  Bottom Layer w0.178: v1(-8.497,61.341) -9.055,60.783 -9.055,37.116 -4.077,32.137 -3.543,32.137 v1(-2.832,31.426)
B5_CLKIN_P: MOD3.10 U6.49 | length 54.1
  Top Layer w0.178: v1@-7.484,60.201 0.2,67.884 MOD3.10@6.265,67.884 ; U6.49@-6.121,27.222 -5.141,27.222 -4.967,27.396 -4.835,27.396 -3.671,28.56 v1@-3.671,33.204
  Bottom Layer w0.178: v1@-7.484,60.201 -8.344,59.341 -8.344,37.471 -4.077,33.204 v1(-3.721,33.204)
  other v1: -7.633,60.052
B6_39_NCEO: CN9.4 D6.5 MOD3.18 | length 12.1
  Top Layer w0.178: MOD3.18@6.265,78.044 D6.5@9.306,78.044 ; D6.5@9.345,78.005 9.345,77.415 9.614,77.146 13.805,77.146 CN9.4@16.561,74.39
B6_44: CN11.3 D12.4 MOD3.28 | length 127.7
  Top Layer w0.178: MOD3.28@6.265,90.744 v1@8.105,90.744 ; D12.4@8.964,-16.741 8.964,-17.073 9.868,-17.977 14.948,-17.977 CN11.3@16.472,-19.501
  Bottom Layer w0.178: v1(7.836,90.744) 5.702,88.611 5.702,25.736 18.225,13.214 18.225,-17.748 CN11.3@16.472,-19.501
B6_46: CN11.5 D12.1 MOD3.30 | length 124.1
  Top Layer w0.178: MOD3.30@4.435,94.034 v1@4.435,95.874 ; D12.1@10.264,-14.641 CN11.5@16.252,-14.641
  Bottom Layer w0.178: v1(4.425,95.884) 4.425,95.632 4.28,95.487 4.28,25.025 17.513,11.792 17.513,-13.38 CN11.5@16.472,-14.421
B6_48: CN11.7 D10.4 MOD3.33 | length 121.4
  Top Layer w0.178: MOD3.33@0.625,94.034 v1(0.625,95.884) ; D10.4@8.964,-5.474 8.964,-6.469 10.757,-8.262 14.186,-8.262 15.265,-9.341 CN11.7@16.472,-9.341
  Bottom Layer w0.178: v1(0.625,95.884) 2.858,93.652 2.858,24.314 4.102,23.069 4.102,18.98 8.014,15.068 8.014,4.934 13.703,-0.756 13.703,-8.084 13.526,-8.262 v1(13.703,-8.262)
B6_49: CN11.8 D10.5 MOD3.34 | length 115.4
  Top Layer w0.178: MOD3.34@-0.645,94.034 v1@-0.645,95.874 ; D10.5@10.264,-5.474 15.145,-5.474 CN11.8@16.472,-6.801
  Bottom Layer w0.178: v1(-0.655,95.884) 2.146,93.083 2.146,23.958 3.391,22.714 3.391,18.447 7.303,14.535 7.303,4.578 12.637,-0.756 v1@12.637,-5.406
  other v1: 12.637,-5.474
B6_50: CN11.9 D10.1 MOD3.36 | length 113.8
  Top Layer w0.178: MOD3.36@-3.185,94.034 v1@-3.185,95.854 ; D10.1@10.264,-3.374 12.918,-3.374 13.805,-4.261 CN11.9@16.472,-4.261
  Bottom Layer w0.178: v1(-3.155,95.884) 1.435,91.294 1.435,23.603 2.68,22.358 2.68,17.913 6.591,14.002 6.591,4.223 11.57,-0.756 v1(11.57,-3.374)
B6_51: CN11.10 D10.3 MOD3.37 | length 114.6
  Top Layer w0.178: MOD3.37@-4.455,94.034 v1(-4.455,95.884) ; D10.3@8.964,-3.374 8.992,-3.346 8.992,-2.066 9.356,-1.702 16.453,-1.702 CN11.10@16.472,-1.721
  Bottom Layer w0.178: v1(-4.455,95.884) 0.724,90.705 0.724,23.247 1.969,22.003 1.969,17.558 5.88,13.646 5.88,3.41 10.503,-1.213 v1(10.503,-1.702)
B6_52: CN9.9 D2.3 MOD3.39 | length 36.9
  Top Layer w0.178: MOD3.39@-6.995,94.034 -6.995,95.335 -6.75,95.58 -6.013,95.58 -4.717,96.876 8.325,96.876 9.767,95.434 v1(9.868,95.434) ; D2.3@11.153,90.168 13.483,90.168 CN9.9@16.472,87.179
  Bottom Layer w0.178: v1(9.868,95.434) 9.868,93.783 CN9.9@16.472,87.179
B6_53: CN9.10 D2.1 MOD3.40 | length 39.2
  Top Layer w0.178: MOD3.40@-8.265,94.034 -8.265,95.335 -7.664,95.936 -6.16,95.936 -4.173,97.923 9.258,97.923 10.681,96.501 v1@10.859,96.501 ; D2.1@9.853,90.168 9.853,90.817 9.97,90.934 11.038,90.934 11.321,91.218 ; 11.316,91.218 14.973,91.218 CN9.10@16.472,89.719
  Bottom Layer w0.178: v1@11.011,96.501 11.011,96.171 12.713,94.469 12.713,93.478 CN9.10@16.472,89.719
  other v1: 10.859,96.323
B8_45: CN11.4 D12.5 MOD3.29 | length 123.9
  Top Layer w0.178: MOD3.29@6.236,92.043 v1(6.236,93.123) ; D12.5@10.264,-16.741 16.252,-16.741 CN11.4@16.472,-16.961
  Bottom Layer w0.178: v1(6.236,93.123) 4.991,91.878 4.991,25.381 17.869,12.503 17.869,-15.564 CN11.4@16.472,-16.961
B8_47: CN11.6 D12.3 MOD3.31 | length 124.6
  Top Layer w0.178: MOD3.31@3.165,94.034 v1@3.165,95.854 ; D12.3@8.964,-14.641 8.964,-13.103 10.185,-11.881 CN11.6@16.472,-11.881
  Bottom Layer w0.178: v1(3.195,95.884) 3.569,95.51 3.569,24.67 4.813,23.425 4.813,19.336 8.725,15.424 8.725,5.264 14.948,-0.959 14.948,-10.357 CN11.6@16.472,-11.881
CONF_DONE: MOD3.17 U6.47 | length 66
  Top Layer w0.178: v1(-7.15,69.526) 0.098,76.774 MOD3.17@6.265,76.774 ; U6.47@-6.121,26.422 -4.935,26.422 -4.672,26.685 -4.54,26.685 -2.654,28.571 v1(-2.654,30.181)
  Bottom Layer w0.178: v1(-7.15,69.526) -9.766,66.91 -9.766,36.81 -3.138,30.181 v1(-2.654,30.181)
DATA0: MOD3.62 U6.65 | length 62.2
  Top Layer w0.178: v1@-27.161,80.575 MOD3.62@-25.311,80.575 ; v1(-16.879,30.734) -14.964,30.734 -14.767,30.537 -14.522,30.537 -14.49,30.569 -13.344,30.569 -12.071,29.296 U6.65@-12.071,28.772
  Bottom Layer w0.178: v1@-27.161,80.575 -26.733,80.575 -19.901,73.742 -19.901,34.626 -16.879,31.605 v1(-16.879,30.734)
  other v1: -27.185,80.575
DCLK: MOD3.59 U6.51 | length 68.1
  Top Layer w0.178: v1@-27.151,84.385 MOD3.59@-25.311,84.385 ; U6.51@-6.121,28.022 -5.792,28.022 v1@-5.407,28.406
  Bottom Layer w0.178: v1@-27.161,84.375 -26.444,84.375 -13.754,71.685 -13.754,41.332 -13.322,40.9 -13.322,36.938 -6.719,30.335 -6.719,29.718 v1@-5.449,28.448
  other v1: -5.524,28.403 -27.185,84.375